# Altium PCB PCB1.PcbDoc
Units mil, origin at the board's own origin, x right, y up, seen from the top; angles counter-clockwise.
Board outline 6000 x 4000 mil, 2 copper layers (Top Layer, Bottom Layer); 7 components, 20 nets, 52 pads, 2 vias.
Unrouted connection lines stored in the file: 8.
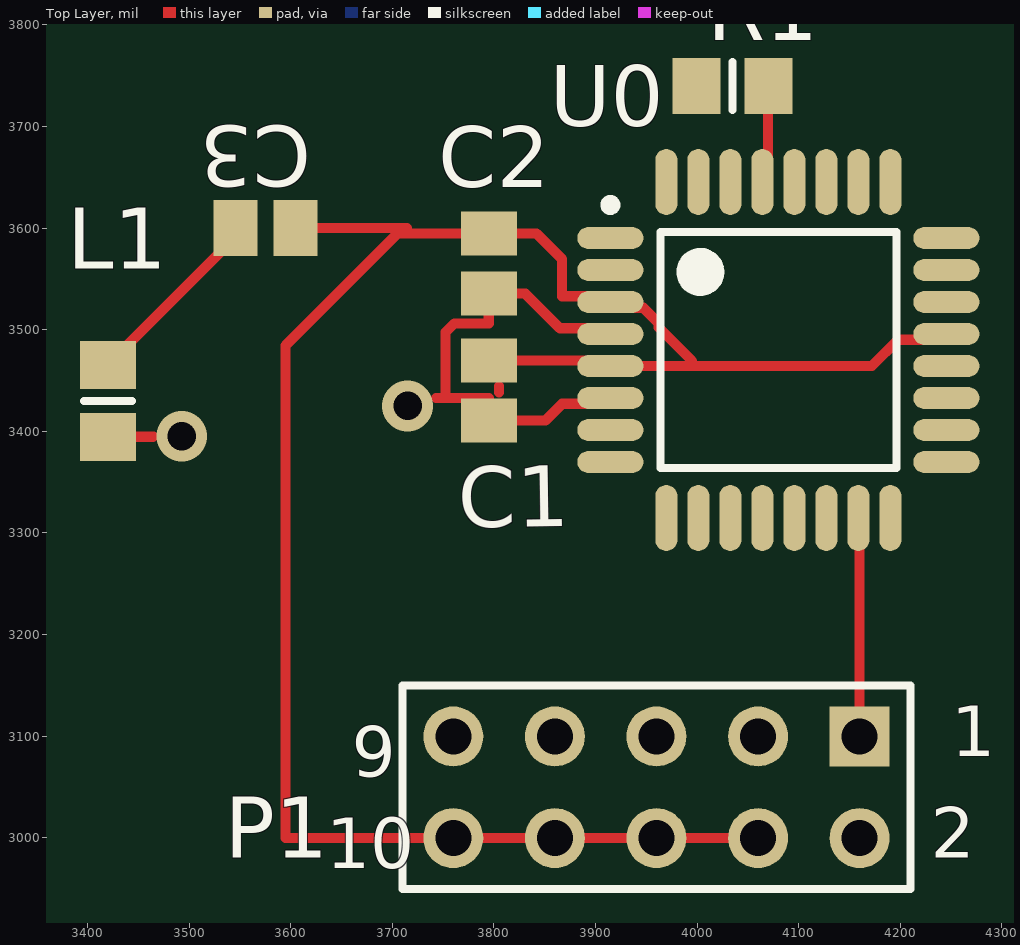
[diagram p0: Top Layer view]
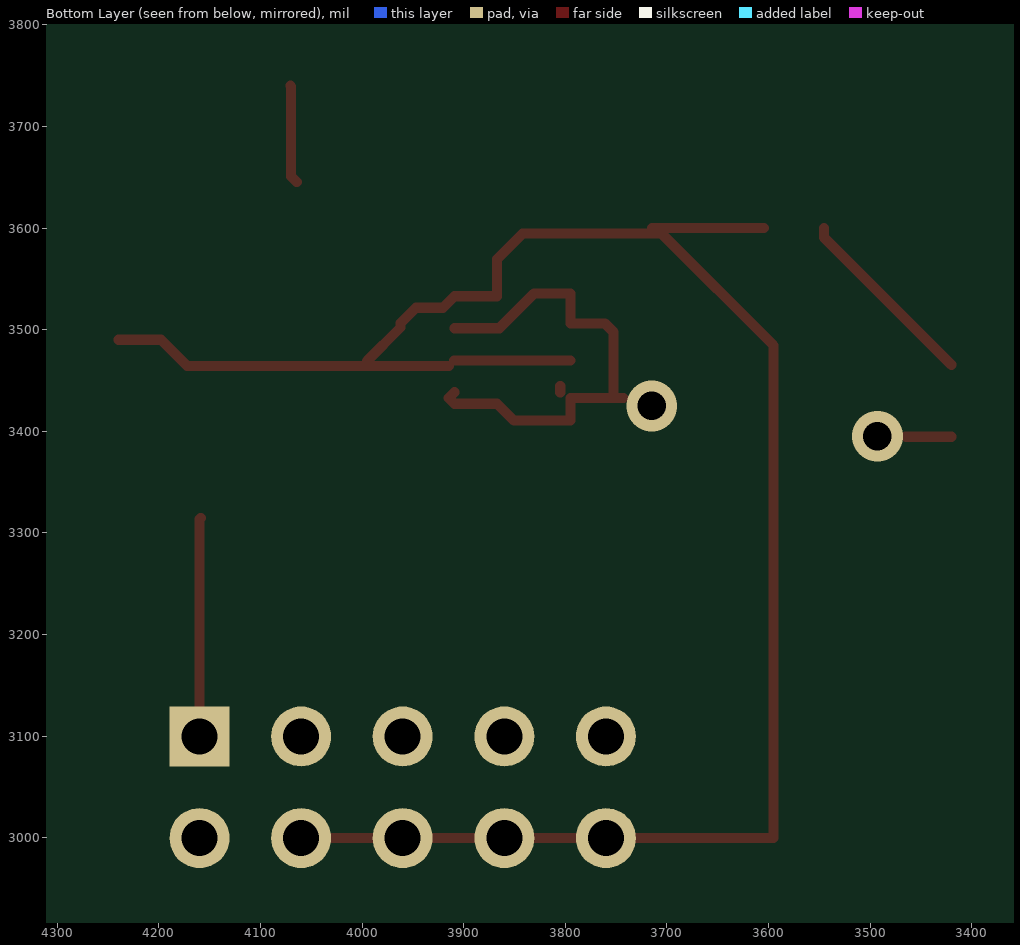
[diagram p1: Bottom Layer view, seen from below]

## Layer stack, top to bottom
Top Solder: solder mask 0.4, Solder Resist, Dk 3.5
Top Layer: signal copper 1.4
Dielectric 1: dielectric 12.6, FR-4, Dk 4.8
Bottom Layer: signal copper 1.4
Bottom Solder: solder mask 0.4, Solder Resist, Dk 3.5

## Board outline
1000,1000 7000,1000 7000,5000 1000,5000

## Design rules (kind name [scope] priority, off if disabled: settings)
Clearance [All] p1: gap=10
PolygonConnect [All] p1: connectstyle=Relief reliefconductorwidth=10 reliefentries=4 polygonreliefangle="90 Angle" airgapwidth=10
RoomDefinition HF-Lipomon-pcb [InComponentClass('HF-Lipomon-pcb')] p1: confinementstyle=ConfineIn formatcopy=TRUE lockcomponents=FALSE outline 2885,2790 4645,2790 4645,3880 2885,3880
RoutingVias [All] p1: holewidth=28 width=50 viastyle="Through Hole" minholewidth=28 minwidth=50 maxholewidth=28 maxwidth=50
SolderMaskExpansion [All] p1: expansion=4
Width [All] p1: maxlimit=10 minlimit=10 preferedwidth=10
30 further rules are at their usual default settings.

## Components (designator, comment, footprint, x,y, rotation, side; value= is the part's Value field where it differs from the comment)
C1 "Cap" C0805 3795,3440 r270 top
C2 "Cap" C0805 3795,3565 r270 top
C3 "Cap" C0805 3575,3600 r180 top
L1 "Choke" 6-0805_N 3420,3430 r90 top
P1 "Kanda Hader 5X2" HDR2X5 4160,3099.57 r180 top
R1 "Res3" 6-0805_N 4035,3740 r180 top
U0 "ATmega88PA-AU" 32A_N 4080,3480 r0 top

## Footprints (in the part's own frame and the unit in brackets; to place one, negate y for a bottom-side part, rotate by r counter-clockwise, add the part's x,y. Pads: shape width x height; smd on the part's side, far side on the other; paste and mask are expansions set on the pad)
6-0805_N [mm] "Chip Resistor, Body 2.0x1.2mm, IPC Medium Density"
  rect 1.2x1.4 smd: 1(-0.9,0) 2(0.9,0)
  silkscreen extent 0,-0.6 0,0.6, body extent -1.07,-0.7 1.07,0.7, height 0.7
32A_N [mm] "Thin QFP, 32-Leads, Body 7x7mm, Pitch 0.8mm, IPC Medium Density"
  oval 1.65x0.55 smd: 1(-4.2,2.8) 2(-4.2,2) 3(-4.2,1.2) 4(-4.2,0.4) 5(-4.2,-0.4) 6(-4.2,-1.2) 7(-4.2,-2) 8(-4.2,-2.8) 17(4.2,-2.8) 18(4.2,-2) 19(4.2,-1.2) 20(4.2,-0.4) 21(4.2,0.4) 22(4.2,1.2) 23(4.2,2) 24(4.2,2.8)
  oval 0.55x1.65 smd: 9(-2.8,-4.2) 10(-2,-4.2) 11(-1.2,-4.2) 12(-0.4,-4.2) 13(0.4,-4.2) 14(1.2,-4.2) 15(2,-4.2) 16(2.8,-4.2) 25(2.8,4.2) 26(2,4.2) 27(1.2,4.2) 28(0.4,4.2) 29(-0.4,4.2) 30(-1.2,4.2) 31(-2,4.2) 32(-2.8,4.2)
  silkscreen extent -4.32,-2.95 2.95,3.75, body extent -3.5,-3.5 3.5,3.5, height 1.2
C0805 [mm] "Chip Capacitor, Body 2.0x1.3mm, IPC High Density"
  rect 1.1x1.4 smd: 1(-0.75,0) 2(0.75,0)
  body extent -1.1,-0.72 1.1,0.72, height 1.4
HDR2X5 [mm] "Connector; Header; 5x2 Position"
  rect 1.5x1.5 hole 0.9: 1(0,0)
  round 1.5 hole 0.9: 2(0,2.54) 3(2.54,0) 4(2.54,2.54) 5(5.08,0) 6(5.08,2.54) 7(7.62,0) 8(7.62,2.54) 9(10.16,0) 10(10.16,2.54)
  silkscreen extent -1.27,-1.27 11.43,3.81

## Part data
C1 C2 C3: "Capacitor"
L1: library part "Inductor Iron", "Magnetic-Core Inductor"
P1: library part "Header 5X2", "Header, 5-Pin, Dual row"
R1: "Resistor"
U0: "8-bit AVR Microcontroller, 8KB Flash, 512 Bytes EEPROM, 1KB SRAM, 32-pin TQFP, Industrial Grade (-40°C to 85°C)"

## Via types
v1: diameter 50, hole 28, Top Layer to Bottom Layer, 2 vias

## Nets (pads, with @x,y where several pads share a name; then routed paths per layer and width w, separated by ;. In a path a pad name is that pad's centre, name@x,y a point inside that pad or via, vN(x,y) a via of type N, cw(c..) or ccw(c..) an arc to the next point about the centre after c; other vN are vias at no path point)
1WIRE: U0.23
GND: C1.1 C2.1 C3.1 P1.4 P1.6 P1.8 P1.10 U0.3 U0.5 U0.21 | length 2031.5
  Top Layer w10: C3.1 3714.53,3600 ; C1.1 U0.5@3909.37,3469.53 ; U0.5 4172.05,3464.25 4197.87,3490.08 U0.21@4239.69,3490.08 ; 3995,3469.25 3962.13,3502.13 3962.13,3506.45 3947,3521.57 3920.32,3521.57 U0.3 3908.98,3532.91 3867.17,3532.91 3867.17,3569.44 3842.08,3594.53 C2.1 3704.96,3594.53 3595,3484.57 3595,2999.57 P1.10 P1.8 P1.6 P1.4
IN0: U0.1
IN1: U0.2
IN2: U0.9
IN3: U0.10
LED: U0.24
MISO: P1.9 U0.16
MOSI: P1.1 U0.15 | length 215.6
  Top Layer w10: U0.15 4160,3313.39 P1.1
NetC3_2: C3.2 L1.2 U0.20 | length 186.5
  Top Layer w10: L1.2 3545.47,3590.91 C3.2
NetP1_5: P1.5 R1.1 U0.29 | length 97.2
  Top Layer w10: U0.29 4069.92,3651.02 4069.92,3739.49 R1.1
OUT0: U0.25
OUT1: U0.26
OUT2: U0.27
OUT3: U0.28
RXD: U0.30
SCK: P1.7 U0.17
TE: U0.32
TXD: U0.31
VCC: C1.2 C2.2 L1.1 P1.2 R1.2 U0.4 U0.6 | length 530.8
  Top Layer w10: L1.1 3464.57,3394.57 3465,3395 ; 3742.87,3432.87 3752.44,3432.87 ; 3805,3438.43 3805,3444.53 ; U0.6@3908.98,3438.43 U0.6 3908.98,3427.09 3867.17,3427.09 3850.55,3410.47 C1.2 3795,3432.87 3752.44,3432.87 ; U0.4@3908.98,3501.42 3864.94,3501.42 3830.89,3535.47 C2.2 3795,3506.18 3761.23,3506.18 3752.44,3497.39 3752.44,3432.87
  other v1: 3715,3425
pads on no net: P1.3 U0.7 U0.8 U0.11 U0.12 U0.13 U0.14 U0.18 U0.19 U0.22
copper on no net: | length 12.2
  Top Layer w10: v1(3492.83,3395) v1@3505,3395

## Text inside footprints (layer, text, board x,y; h text height)
P1: Top Overlay "2" at 4230,2980 h50; Top Overlay "1" at 4250,3080 h50; Top Overlay "9" at 3660,3060 h50; Top Overlay "10" at 3635,2970 h50